# Altium PCB RJ45_Breakout.PcbDoc
Units mm, origin at the board's own origin, x right, y up, seen from the top; angles counter-clockwise.
Board outline 38.8 x 46.3 mm, 2 copper layers (Top Layer, Bottom Layer); 18 components, 9 nets, 60 pads, 5 vias.
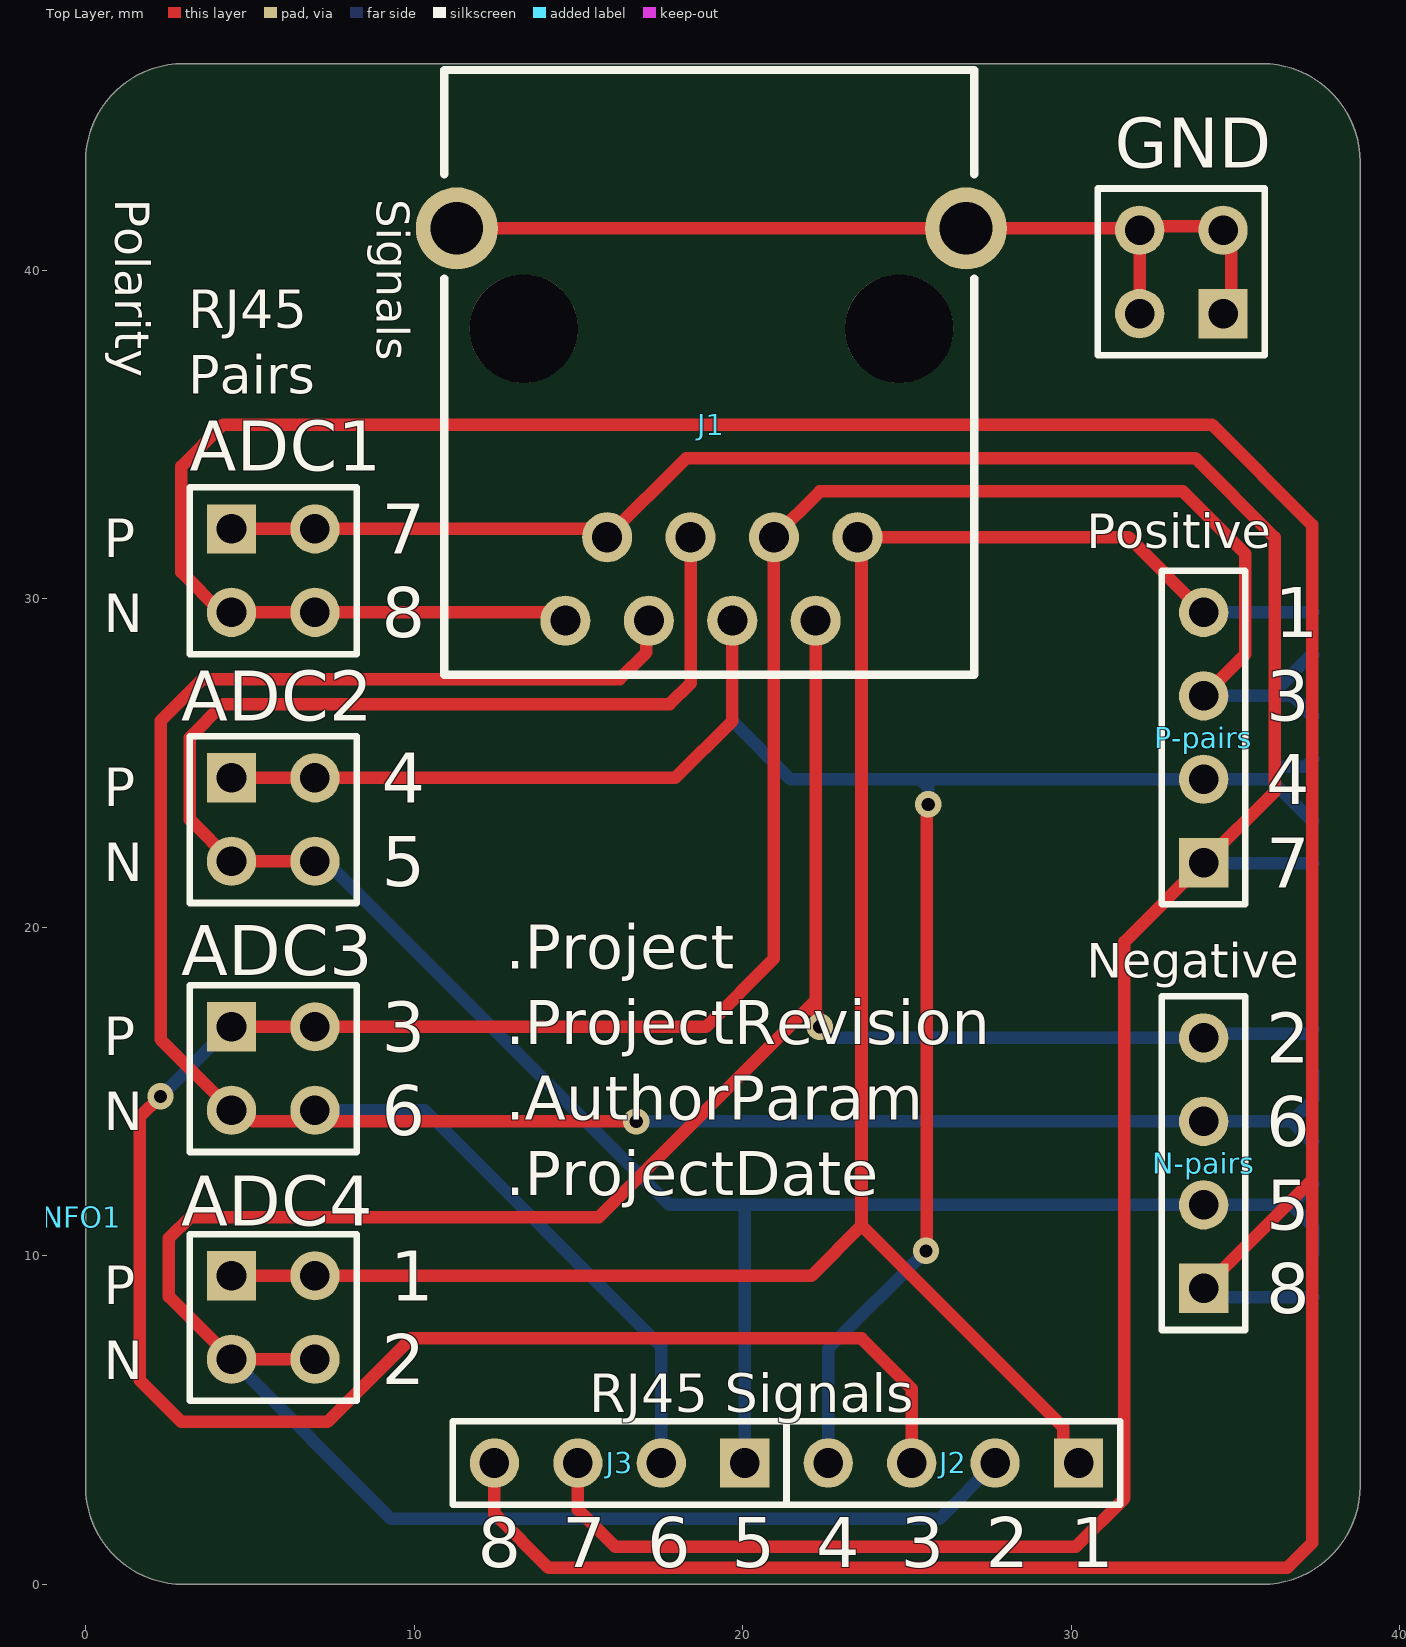
[diagram p0: Top Layer view]
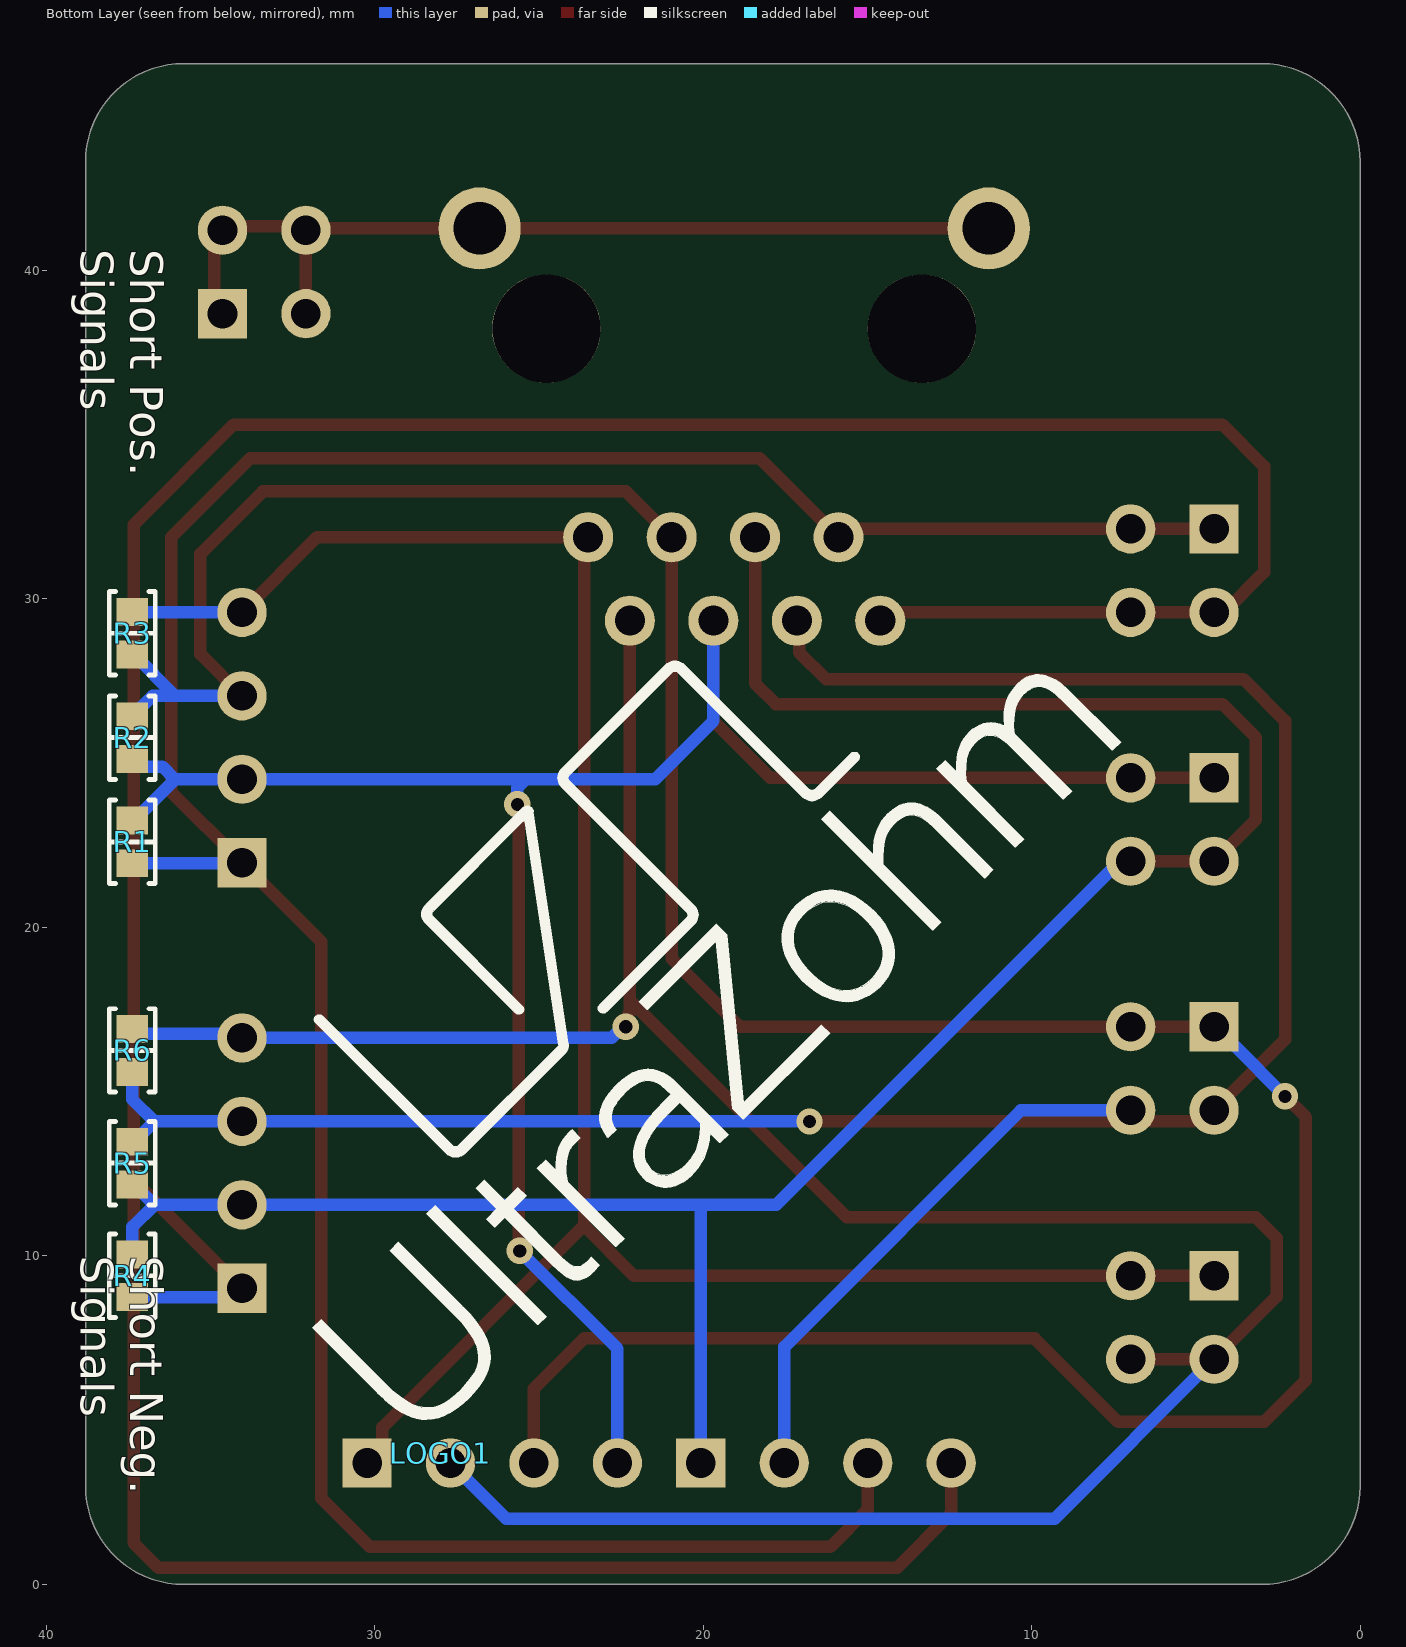
[diagram p1: Bottom Layer view, seen from below]
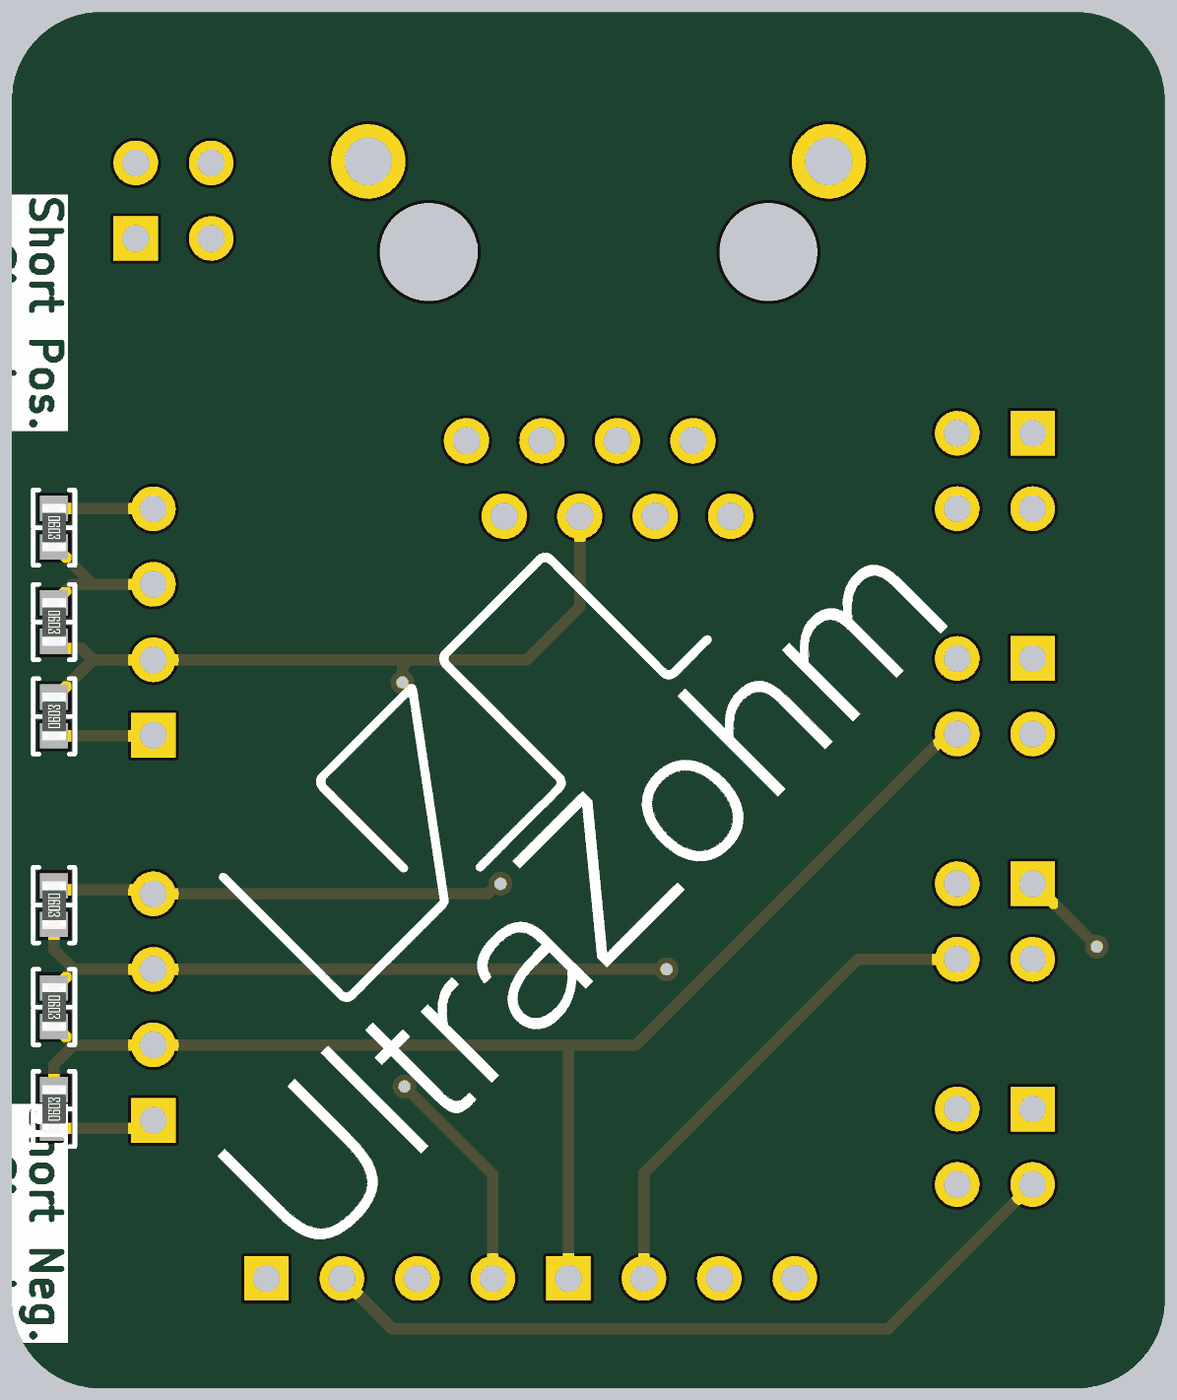
[diagram p2: 3D render of the assembled board from below, using the file's embedded part models]

## Layer stack, top to bottom
Top Solder: solder mask 0.0102, Solder Resist, Dk 3.5
Top Layer: signal copper 0.0356
Dielectric 1: dielectric 0.32, FR-4, Dk 4.8
Bottom Layer: signal copper 0.0356
Bottom Solder: solder mask 0.0102, Solder Resist, Dk 3.5

## Board outline
0,3 0,43.3 cw(c3,43.3) 3,46.3 35.8,46.3 cw(c35.8,43.3) 38.8,43.3 38.8,3 cw(c35.8,3) 35.8,0 3,0 cw(c3,3)

## Design rules (kind name [scope] priority, off if disabled: settings)
Clearance [All] p1: gap=0.254 ignorepadtopadclearanceinfootprint=FALSE except(0: Arc-Hole Track-Hole SMDPad-Hole THPad-Hole Via-Hole Fill-Hole Poly-Hole Region-Hole Text-Hole)
DiffPairsRouting [All] p1: maxlimit=0.254 minlimit=0.254 mostfreqgap=0.254 toplayer_minwidth=0.254 toplayer_maxwidth=0.381 toplayer_prefwidth=0.254 bottomlayer_minwidth=0.254 bottomlayer_maxwidth=0.381 bottomlayer_prefwidth=0.254 maxuncoupledlength=12.7
HoleSize [All] p1: absolutevalues=TRUE maxlimit=3.302 minlimit=0.025 maxpercent=80.000 minpercent=20.000
PolygonConnect [All] p1: connectstyle=Relief reliefconductorwidth=0.254 reliefentries=4 polygonreliefangle="90 Angle" airgapwidth=0.254
RoutingVias [All] p1: holewidth=0.6 width=1.2 viastyle="Through Hole" minholewidth=0.3 minwidth=0.6 maxholewidth=0.4 maxwidth=0.8
SilkToSolderMaskClearance [IsPad] p1: minsilkscreentomaskgap=0.127 clearancetoexposedcopper=TRUE
SolderMaskExpansion [All] p1: expansion=0.102 istentingtop=FALSE
UnRoutedNet [All] p1: checkbadconnections=TRUE
Width [All] p1: maxlimit=0.762 minlimit=0.254 preferedwidth=0.254
26 further rules are at their usual default settings.

## Components (designator, comment, footprint, x,y, rotation, side; value= is the part's Value field where it differs from the comment)
ADC1 "Header 2X2" HDR2X2 4.445,32.133 r270 top
ADC2 "Header 2X2" HDR2X2 4.445,24.555 r270 top
ADC3 "Header 2X2" HDR2X2 4.445,16.976 r270 top
ADC4 "Header 2X2" HDR2X2 4.445,9.398 r270 top
GND "Header 2X2" HDR2X2 34.629,38.686 r90 top
INFO1 "Design Information" Design_info -0.254,11.176 r0 top
J1 "RJ45_JLC" RJ45_JLC 19.053,35.309 r0 top
J2 "Header 4" HDR1X4 30.229,3.699 r180 top
J3 "Header 4" HDR1X4 20.069,3.699 r180 top
LOGO1 "UZ Logo" UZ_Logo_small 28,4 r135 bottom value=Logo
N-pairs "Header 4" HDR1X4 34.036,9.017 r90 top
P-pairs "Header 4" HDR1X4 34.036,21.971 r90 top
R1 "0R" "RES 0603_1608" 37.377,22.606 r90 bottom
R2 "0R" "RES 0603_1608" 37.377,25.781 r270 bottom
R3 "0R" "RES 0603_1608" 37.377,28.956 r270 bottom
R4 "0R" "RES 0603_1608" 37.377,9.398 r90 bottom
R5 "0R" "RES 0603_1608" 37.377,12.827 r270 bottom
R6 "0R" "RES 0603_1608" 37.377,16.256 r270 bottom

## Footprints (in the part's own frame and the unit in brackets; to place one, negate y for a bottom-side part, rotate by r counter-clockwise, add the part's x,y. Pads: shape width x height; smd on the part's side, far side on the other; paste and mask are expansions set on the pad)
Design_info [mm] "Design information about the PCB"
HDR1X4 [mm] "Connector; Header; 4 Position"
  rect 1.5x1.5 hole 0.9: 1(0,0)
  round 1.5 hole 0.9: 2(2.54,0) 3(5.08,0) 4(7.62,0)
  silkscreen extent -1.27,-1.27 8.89,1.27
HDR2X2 [mm] "Connector; Header; 2x2 Position"
  rect 1.5x1.5 hole 0.9: 1(0,0)
  round 1.5 hole 0.9: 2(0,2.54) 3(2.54,0) 4(2.54,2.54)
  silkscreen extent -1.27,-1.27 3.81,3.81
"RES 0603_1608" [mm] "Chip Resistor, 2-Leads, Body 1.60x0.80mm, IPC Medium Density"
  rect 0.85x0.95 smd: 1(-0.65,0) 2(0.65,0)
  silkscreen extent -1.27,-0.7 1.27,0.7, body extent -0.8,-0.4 0.8,0.4, height 0.45
RJ45_JLC [mm]
  round 1.524 hole 0.914: 1(4.445,-3.43) 2(3.175,-5.97) 3(1.905,-3.43) 4(0.635,-5.97) 5(-0.635,-3.43) 6(-1.905,-5.97) 7(-3.175,-3.43) 8(-4.445,-5.97)
  round 3.3 hole 3.3 unplated: MH1(5.715,2.92) MH2(-5.715,2.92)
  round 2.5 hole 1.6: S1(7.75,5.97) S2(-7.75,5.97)
  silkscreen extent -8.13,-7.62 8,10.79
UZ_Logo_small [mm] "logo width 3cm"
  silkscreen extent -0.05,0.57 29.94,12.12

## Part data
ADC1 ADC2 ADC3 ADC4 GND: "Header, 2-Pin, Dual row", LCSC Part #=C160338, LatestRevisionDate=17-Jul-2002, LatestRevisionNote="Re-released for DXP Platform.", Publisher="Altium Limited"
INFO1: Manufacturer=UltraZohm, Supplier Part Number 1=-, Component Type="Design Information", ComponentLink1Description=https://docs.ultrazohm.com/, ComponentLink1URL=homepage, Created from=MGremer, Created On="03.11.2021 09:04:23", Last Updated="03.11.2021 09:28:34", Live Cycle Status=1, Manufacturer Part Number="Design Information", PartID=12, Supplier 1=-, Type="Design Information"
J1: "Modular Jack WR-MJ, Tab Down, Shielded, Horizontal Entry, THT, 8P8C", Contact Resistance="20 mOhm", LCSC Part #=C386758, Operating Temperature="-40 to 85 degC", Part Number=61500814221, Rated Current="1.5 A", Withstanding Voltage="1000 VAC", Working Voltage="120 VAC", Compliance="Lead free / RoHS", ComponentLink1Description=Manufacturer, ComponentLink1URL=http://www.we-online.de, ComponentLink2Description=Datasheet, ComponentLink2URL=https://katalog.we-online.de/em/datasheet/61500814221.pdf, Entrance=Horizontal, Mounting Technology=THT, Packaging=Tray, Pin Number=8P8C, Port=1x1, Published Date="July 2018", Publisher="Wurth Elektronik"
J2 J3 N-pairs P-pairs: "Header, 4-Pin", LCSC Part #=C124378, LatestRevisionDate=17-Jul-2002, LatestRevisionNote="Re-released for DXP Platform.", Publisher="Altium Limited"
LOGO1: library part "Logo small", Manufacturer=UltraZohm, Supplier Part Number 1=-, Component Type=Logo, ComponentLink1Description=https://docs.ultrazohm.com/, ComponentLink1URL=homepage, Created=Jan2021_Liegmann, Created from=MGremer, Created On="03.11.2021 09:04:23", Last Updated="03.11.2021 09:05:50", Live Cycle Status=1, Manufacturer Part Number="Logo small", PartID=10, Supplier 1=-, Type=Logo
R1 R2 R3 R4 R5 R6: library part RC0603JR-070RL, "SMD resistor E24 series", Device Package=0603, LCSC Part Number=C21189, Manufacturer=YAGEO, Supplier Part Number 1=603-RC0603JR-070RL, Tolerance=5%, Component Type="SMD resistor", ComponentLink1Description=Datasheet, ComponentLink1URL=https://www.mouser.de/datasheet/2/447/PYu-RC_Group_51_RoHS_L_10-1664068.pdf, Created from=MGremer, Created On="14.12.2020 16:17:14", Last Updated="04.03.2021 09:09:42", Live Cycle Status=1, Manufacturer Part Number=RC0603JR-070RL, Mounting Type=SMD, PartID=1, Stock number="Labor SMD Container", Supplier 1=Mouser, Supplier 2=LCSC, Supplier Part Number 2=C21189, Type=Resistor

## Via types
v1: diameter 0.8, hole 0.4, Top Layer to Bottom Layer, tented both sides, 5 vias

## Nets (pads, with @x,y where several pads share a name; then routed paths per layer and width w, separated by ;. In a path a pad name is that pad's centre, name@x,y a point inside that pad or via, vN(x,y) a via of type N, cw(c..) or ccw(c..) an arc to the next point about the centre after c; other vN are vias at no path point)
CH1: ADC4.1 ADC4.2 J1.1 J2.1 P-pairs.4 R3.1 | length 65.6
  Top Layer w0.381: ADC4.1 22.098,9.398 23.622,10.922 ; J2.1 29.764,4.164 29.764,4.78 23.622,10.922 ; P-pairs.4 31.748,31.879 J1.1 23.622,31.755 23.622,10.922
  Bottom Layer w0.381: P-pairs.4 34.044,29.599 37.369,29.599 R3.1
CH2: ADC4.3 ADC4.4 J1.2 J2.2 N-pairs.4 R6.1 | length 83.4
  Top Layer w0.381: ADC4.4 ADC4.3 2.54,8.763 2.54,10.541 3.175,11.176 15.621,11.176 22.228,17.783 ; J1.2 22.228,17.783 ; v1(22.353,16.976) 22.273,17.057 22.273,17.353 22.228,17.398 22.228,17.783
  Bottom Layer w0.381: ADC4.3 9.303,2 25.99,2 J2.2 ; v1(22.353,16.976) 22.446,16.976 22.786,16.637 N-pairs.4 34.171,16.772 37.242,16.772 R6.1
CH3: ADC3.1 ADC3.2 J1.3 J2.3 P-pairs.3 R2.1 R3.2 | length 96.1
  Top Layer w0.381: v1(2.286,14.859) 1.651,14.224 1.651,6.223 2.921,4.953 7.366,4.953 9.906,7.493 23.622,7.493 25.149,5.966 J2.3 ; ADC3.1 18.881,16.976 20.958,19.053 J1.3 22.353,33.274 33.401,33.274 35.306,31.369 35.306,28.321 P-pairs.3
  Bottom Layer w0.381: v1(2.286,14.859) 3.844,16.417 3.885,16.417 ADC3.1 ; P-pairs.3 36.072,27.051 ; R2.1 37.327,26.431 37.092,26.666 37.092,26.716 36.757,27.051 36.072,27.051 ; R3.2 37.327,28.306 36.072,27.051
CH4: ADC2.1 ADC2.2 J1.4 J2.4 P-pairs.2 R1.2 R2.2 | length 64.7
  Top Layer w0.381: ADC2.1 ADC2.2 17.951,24.555 19.688,26.292 J1.4 ; v1(25.583,10.156) 25.614,10.187 25.614,23.709 v1(25.654,23.749)
  Bottom Layer w0.381: J1.4 19.688,26.286 21.463,24.511 25.403,24.511 ; J2.4 22.609,7.182 v1(25.583,10.156) ; v1(25.654,23.749) 25.654,24.26 25.403,24.511 ; R1.2 37.327,23.256 36.072,24.511 ; R2.2 37.142,24.897 36.458,24.897 36.072,24.511 ; 25.403,24.511 P-pairs.2 36.072,24.511
CH5: ADC2.3 ADC2.4 J1.5 J3.1 N-pairs.2 R4.2 R5.2 | length 71.8
  Top Layer w0.381: ADC2.4@7.322,22.015 ADC2.3 3.175,23.285 3.175,25.781 4.191,26.797 17.783,26.797 18.418,27.432 J1.5
  Bottom Layer w0.381: ADC2.4@7.322,22.015 17.78,11.557 20.069,11.557 ; J3.1 20.069,11.557 ; R4.2 37.377,10.887 36.707,11.557 ; R5.2 37.327,12.177 36.707,11.557 ; 20.069,11.557 36.707,11.557
CH6: ADC3.3 ADC3.4 J1.6 J3.2 N-pairs.3 R5.1 R6.2 | length 82.1
  Top Layer w0.381: v1(16.764,14.097) 5.087,14.097 4.748,14.436 ADC3.3 2.286,16.595 2.286,26.289 3.556,27.559 16.256,27.559 17.074,28.377 17.074,29.265 J1.6
  Bottom Layer w0.381: ADC3.3 ADC3.3@4.784,14.097 ; ADC3.4 10.329,14.436 17.529,7.236 J3.2 ; v1(16.764,14.097) N-pairs.3 36.707,14.097 ; R5.1 37.327,13.477 36.707,14.097 ; R6.2 37.377,14.767 36.707,14.097
CH7: ADC1.1 ADC1.2 J1.7 J3.3 P-pairs.1 R1.1 | length 87.5
  Top Layer w0.381: ADC1.1 ADC1.2 15.348,32.133 15.602,31.879 J1.7 18.289,34.29 33.782,34.29 36.195,31.877 36.195,24.13 P-pairs.1 31.623,19.558 31.623,2.623 30.143,1.143 16.129,1.143 14.989,2.283 J3.3
  Bottom Layer w0.381: P-pairs.1 34.051,21.956 R1.1
CH8: ADC1.3 ADC1.4 J1.8 J3.4 N-pairs.1 R4.1 | length 118.3
  Top Layer w0.381: J3.4 12.449,2.156 14.097,0.508 36.576,0.508 37.338,1.27 37.338,12.319 ; J1.8 14.332,29.339 14.078,29.593 ADC1.4 ADC1.3 4.142,29.593 2.921,30.814 2.921,34.036 4.191,35.306 34.29,35.306 37.338,32.258 37.338,12.319 ; N-pairs.1 37.338,12.319
  Bottom Layer w0.381: N-pairs.1 34.305,8.748 R4.1
GND: GND.1 GND.2 GND.3 GND.4 J1.S1 J1.S2 | length 29.1
  Top Layer w0.381: J1.S2@10.908,41.279 J1.S2 J1.S1 32.036,41.279 GND.4 GND.2 ; GND.4@32.089,41.353 34.883,41.353 GND.1@34.883,38.813
pads on no net: J1.MH1 J1.MH2

## Silkscreen, mask and mechanical layers (free items; w line width, h text height)
Top Overlay:
  text "Polarity" at 0.55,42.186 h1.8 r270
  text "Signals" at 8.867,42.17 h1 r270
  text "RJ45 / Pairs" at 3.122,35.868 h2
  text "7" at 9.017,31.371 h1.52
  text "Positive" at 30.471,31.189 h1.8
  text "P" at 0.561,30.893 h2
  text "8" at 9.017,28.831 h1.52
  text "1" at 36.2,28.829 h1.52
  text "N" at 0.561,28.605 h2
  text "3" at 35.946,26.289 h1.52
  text "4" at 9.017,23.793 h1.52
  text "4" at 35.946,23.749 h1.52
  text "P" at 0.561,23.315 h2
  text "5" at 9.017,21.253 h1.52
  text "7" at 35.946,21.209 h1.52
  text "N" at 0.561,21.027 h2
  text "Negative" at 30.471,18.124 h1.8
  text "3" at 9.017,16.215 h1.52
  text "2" at 35.946,15.875 h1.52
  text "P" at 0.561,15.736 h2
  text "6" at 9.017,13.675 h1.52
  text "N" at 0.561,13.448 h2
  text "6" at 35.946,13.335 h1.52
  text "5" at 35.946,10.795 h1.52
  text "1" at 9.271,8.636 h1.52
  text "8" at 35.946,8.255 h1.52
  text "P" at 0.561,8.158 h2
  text "2" at 9.017,6.096 h1.52
  text "N" at 0.561,5.87 h2
  text "RJ45 Signals" at 15.329,4.862 h2
  text "8" at 11.941,0.532 h1.52
  text "7" at 14.517,0.532 h1.52
  text "6" at 17.094,0.532 h1.52
  text "5" at 19.67,0.532 h1.52
  text "4" at 22.246,0.532 h1.52
  text "3" at 24.823,0.532 h1.52
  text "2" at 27.399,0.532 h1.52
  text "1" at 29.975,0.532 h1.52
Bottom Overlay:
  text "Short Pos.  / Signals" at 38.942,40.639 h1 r90
  text "Short Neg.  / Signals" at 38.942,10.004 h1 r90
Mechanical 1:
  the board outline again, w0.254

## Dimensions
35.8,46.3 to 35.8,0 on Mechanical 2
3,46.3 to 35.8,46.3 on Mechanical 2